# Altium PCB PCB1.PcbDoc
Units mil, origin at the board's own origin, x right, y up, seen from the top; angles counter-clockwise.
Board outline 2952.76 x 1968.5 mil, 4 copper layers (Top Layer, GND, PWR, Bottom Layer); 53 components, 44 nets, 180 pads, 57 vias.
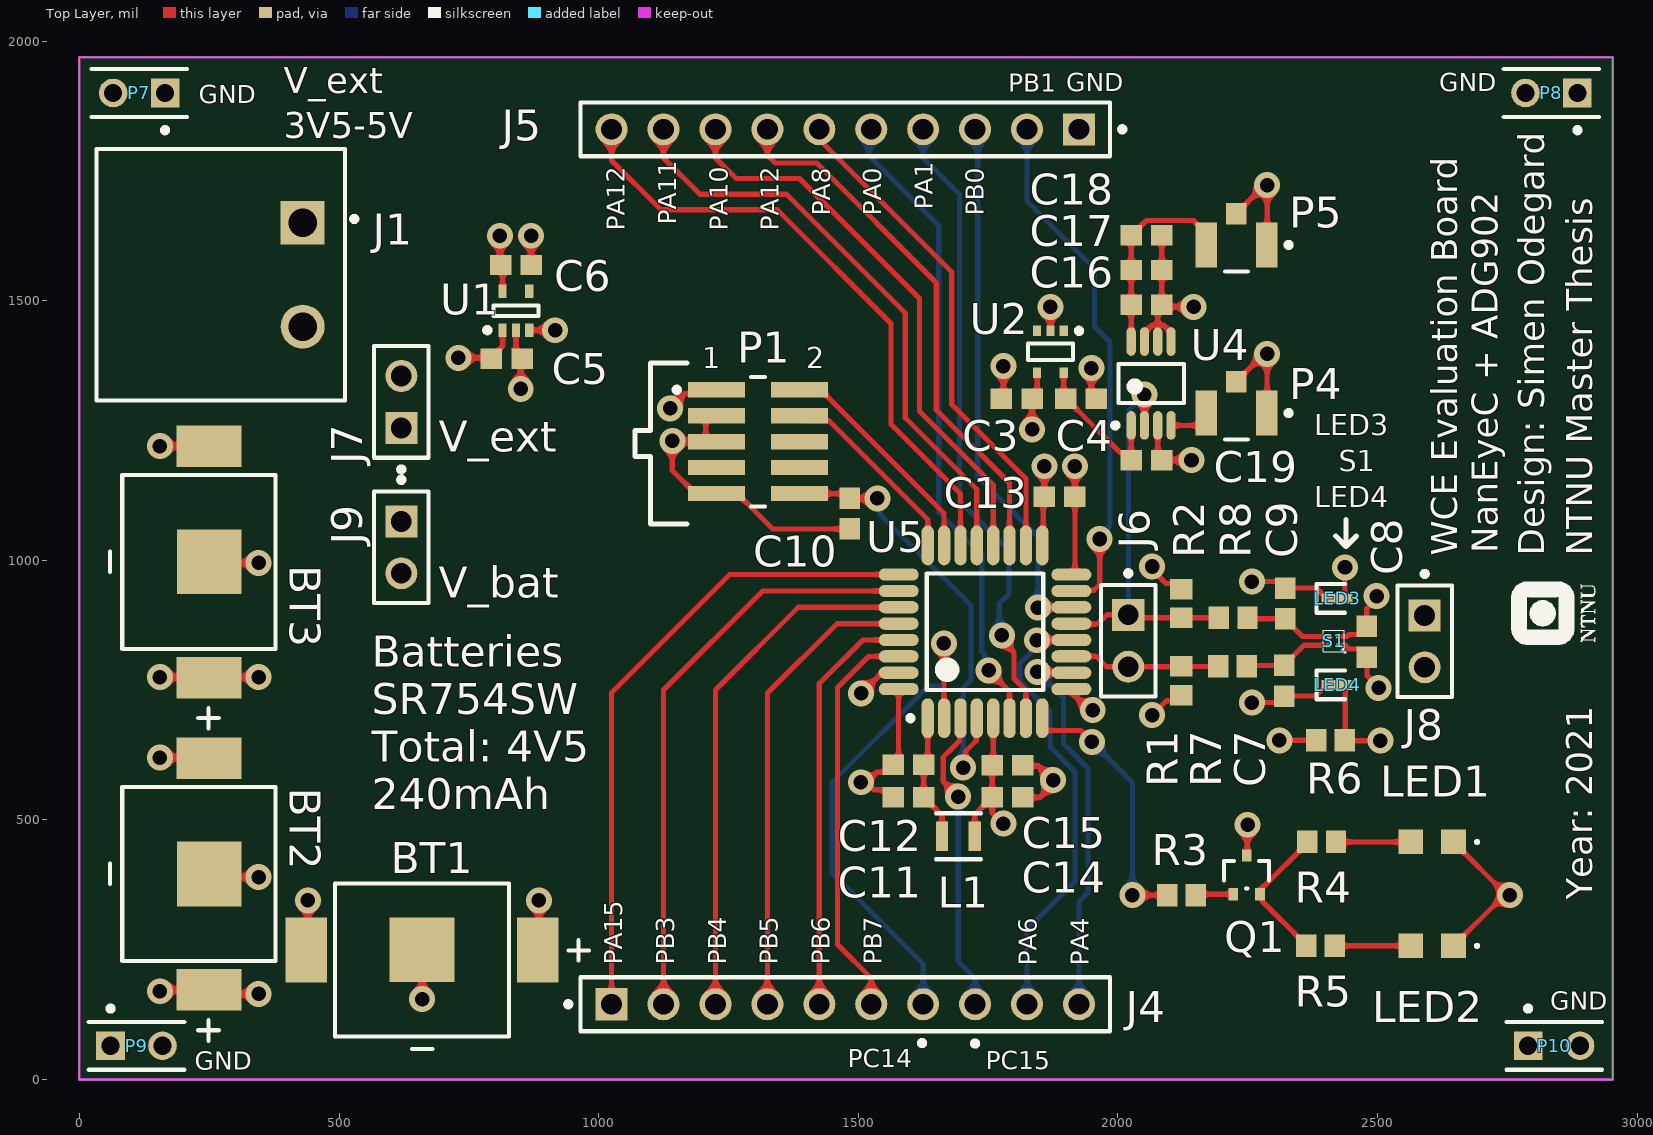
[diagram p0: Top Layer view]
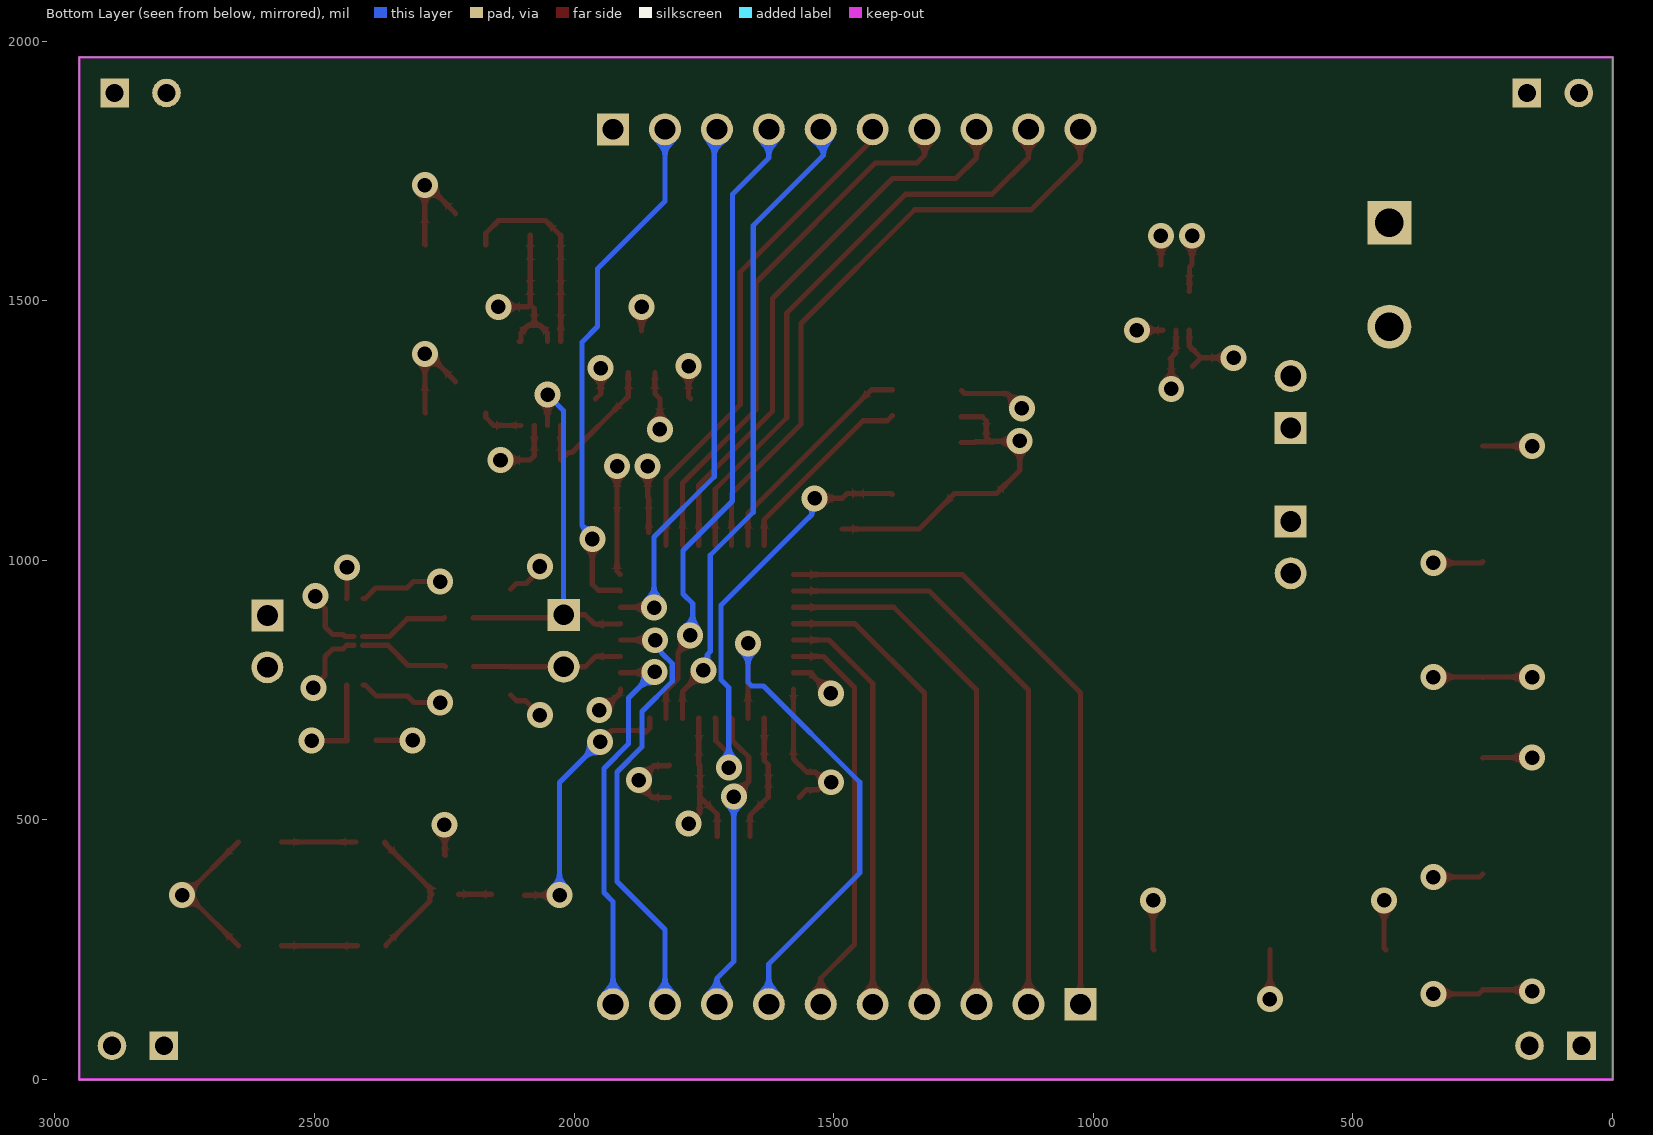
[diagram p1: Bottom Layer view, seen from below]
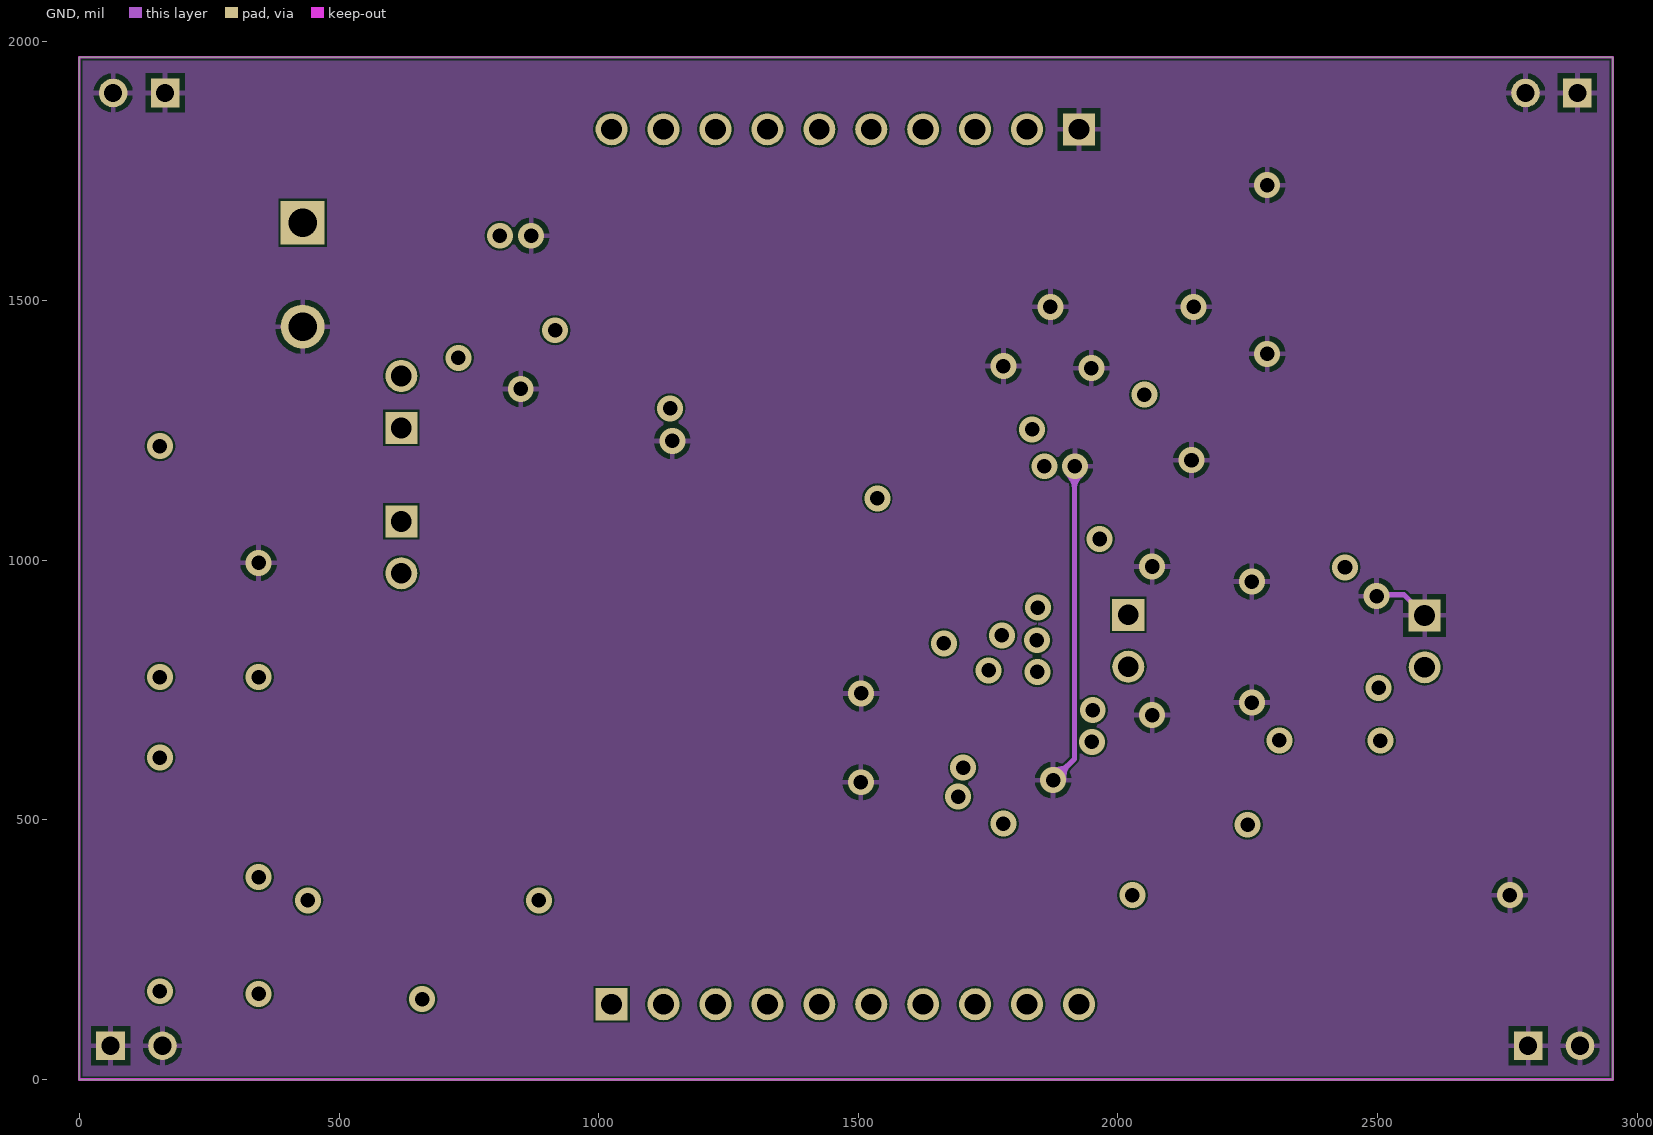
[diagram p2: GND]
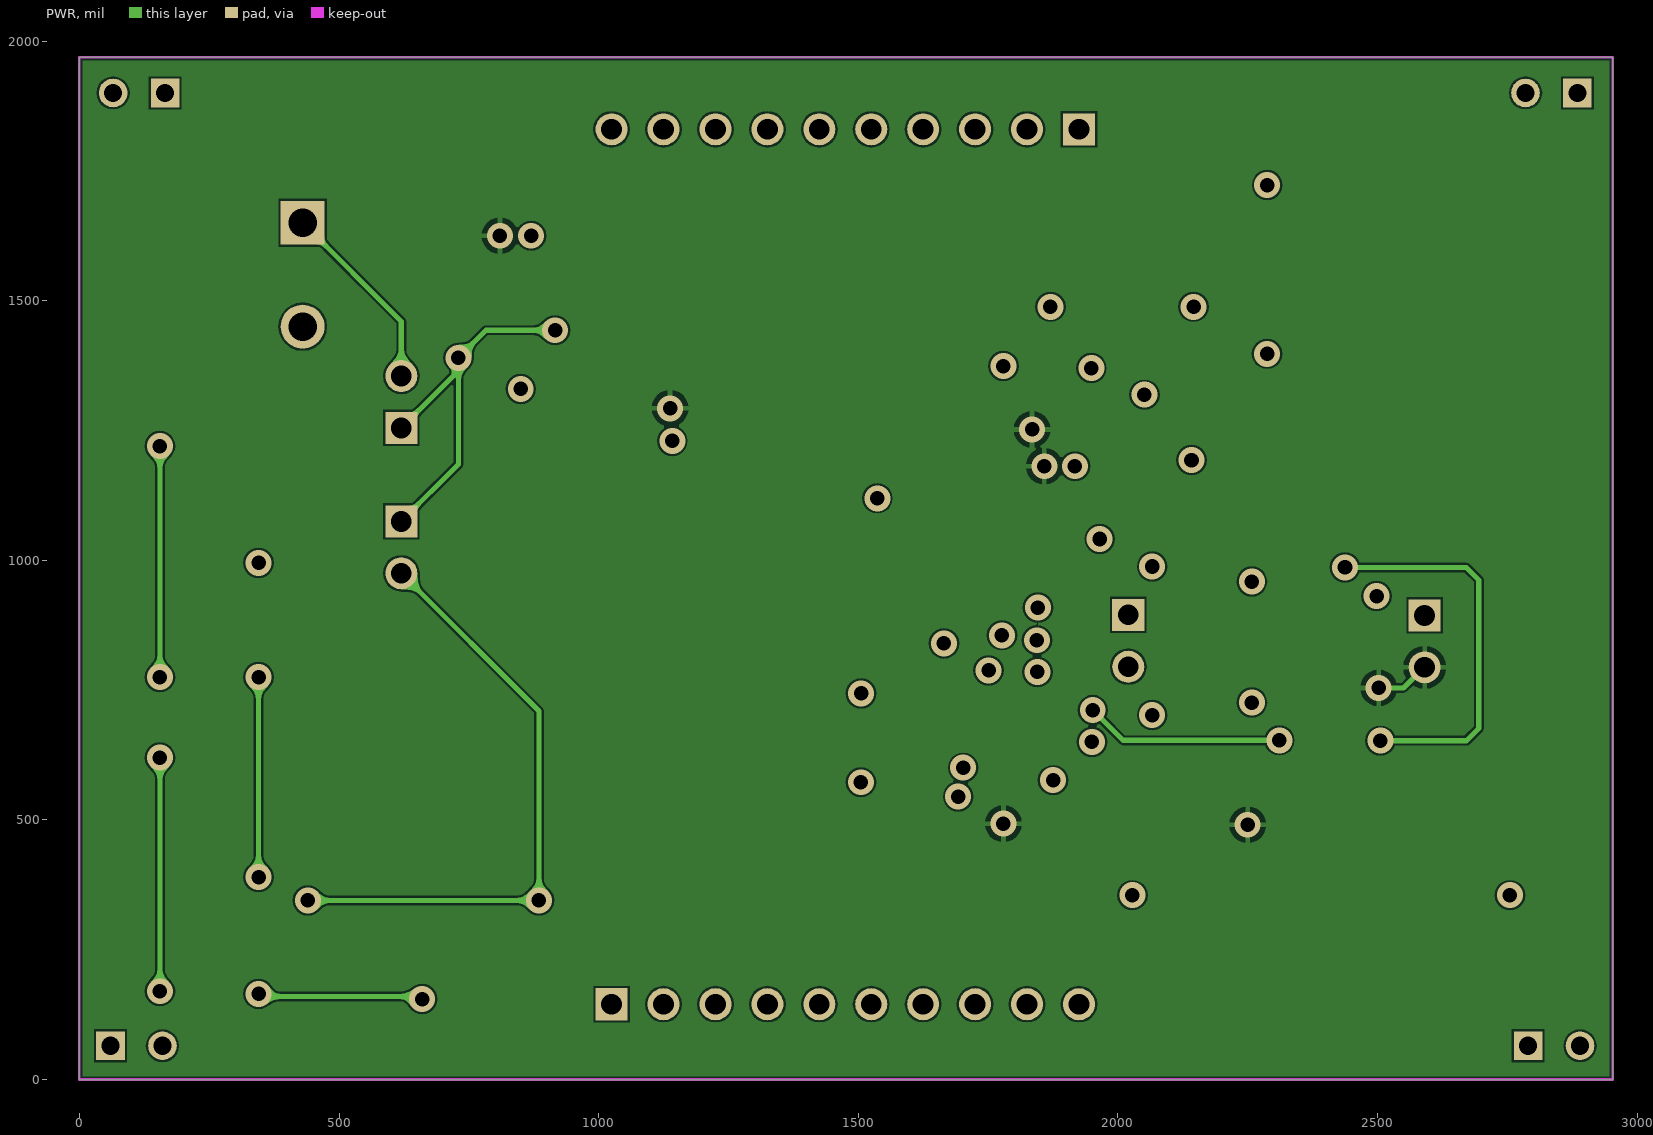
[diagram p3: PWR]

## Layer stack, top to bottom
Top Solder: solder mask 0.4, Solder Resist, Dk 3.5
Top Layer: signal copper 1.4
Dielectric1: core 12.6, FR-4, Dk 4.8
GND: signal copper 1.4
Dielectric2: prepreg 12.6, FR-4, Dk 4.8
PWR: signal copper 1.4
Dielectric3: core 12.6, FR-4, Dk 4.8
Bottom Layer: signal copper 1.4
Bottom Solder: solder mask 0.4, Solder Resist, Dk 3.5

## Board outline
0,0 2952.76,0 2952.76,1968.5 0,1968.5

## Design rules (kind name [scope] priority, off if disabled: settings)
Clearance [All] p1: gap=3.94 ignorepadtopadclearanceinfootprint=TRUE
PolygonConnect [All] p1: connectstyle=Relief reliefconductorwidth=10 reliefentries=4 polygonreliefangle="90 Angle" airgapwidth=10
RoutingCorners [All] p1: cornerstyle=45-Degree minsetback=3.94 maxsetback=3.94
RoutingVias [All] p1: holewidth=28 width=50 viastyle="Through Hole" minholewidth=28 minwidth=50 maxholewidth=28 maxwidth=50
SolderMaskExpansion [All] p1: expansion=4 istentingtop=TRUE useseparateexpansions=TRUE expansionbottom=4 istentingbottom=TRUE
Width [All] p1: maxlimit=10 minlimit=3.94 preferedwidth=10
29 further rules are at their usual default settings.

## Components (designator, comment, footprint, x,y, rotation, side; value= is the part's Value field where it differs from the comment)
BT1 "2988" FP-2988-MFG 660,230 r180 top
BT2 "2988" FP-2988-MFG 230,396 r90 top
BT3 "2988" FP-2988-MFG 230,997 r90 top
C3 "0.1uF_X5R_0603" CAPC1608X90X35NL15T15 1805.12,1311.02 r0 top
C4 "0.1uF_X5R_0603" CAPC1608X90X35NL15T15 1929.13,1311.02 r180 top
C5 "0.1uF_X5R_0603" CAPC1608X90X35NL15T15 823.03,1388.23 r180 top
C6 "0.1uF_X5R_0603" CAPC1608X90X35NL15T15 840.75,1568.7 r180 top
C7 "15pF" CAPC1608X90X35NL15T15 2320.6,768 r90 top
C8 "470nF" CAPC1608X90X35NL15T15 2479.57,843.04 r270 top
C9 "15pF" CAPC1608X90X35NL15T15 2322,917 r270 top
C10 "100nF" CAPC1608X90X35NL15T15 1483.69,1089.83 r90 top
C11 "0.1uF" CAPC1608X90X35NL15T15 1596.46,543.31 r0 top
C12 "100nF" CAPC1608X90X35NL15T15 1596.46,606.3 r0 top
C13 "100nF" CAPC1608X90X35NL15T15 1887.79,1122.05 r180 top
C14 "100nF" CAPC1608X90X35NL15T15 1787.4,543.31 r180 top
C15 "10uF" CAPC1608X90X35NL15T15 1787.4,605.32 r180 top
C16 "470nF" CAPC1608X90X35NL15T15 2055.12,1492.13 r180 top
C17 "NC" CAPC1608X90X35NL15T15 2055.12,1559.06 r180 top
C18 "NC" CAPC1608X90X35NL15T15 2055.12,1625.98 r180 top
C19 "0.1uF_X5R_0603" CAPC1608X90X35NL15T15 2055.12,1192.91 r180 top
J1 "1757242" FP-1757242-MFG 272.52,1550 r270 top
J4 "M20-9771046" FP-M20-9771046-MFG 1475,145 r0 top
J5 "M20-9771046" FP-M20-9771046-MFG 1475,1830 r180 top
J6 "TSW-102-07-G-S" FP-TSW-102-07-G-S-MFG 2020,845 r270 top
J7 "TSW-102-07-G-S" FP-TSW-102-07-G-S-MFG 620,1305 r90 top
J8 "TSW-102-07-G-S" FP-TSW-102-07-G-S-MFG 2590.8,843.88 r270 top
J9 "TSW-102-07-G-S" FP-TSW-102-07-G-S-MFG 620,1025 r270 top
L1 "CB2012T101K" FP-CB2012-MFG 1692.91,468.5 r0 top
LED1 "IN-S85AT5UW" INS85AT5UW 2605,457.5 r180 top
LED2 "IN-S85AT5UW" INS85AT5UW 2605,257.5 r180 top
LED3 "SML-LX0201NWD-TR" LEDC0604X46N 2422,926.5 r0 top
LED4 "SML-LX0201NWD-TR" LEDC0604X46N 2422,759.9 r0 top
P1 "FTSH-105-01-L-DV" SMTC-FTSH-105-01-L-DV_V 1307.09,1228.35 r270 top
P4 "U.FL-R-SMT-1(01)" HRS-U.FL-R-SMT-3_V 2228.35,1283.46 r180 top
P5 "U.FL-R-SMT-1(01)" HRS-U.FL-R-SMT-3_V 2228.35,1607.34 r180 top
P7 "5-146280-2" TECO-5-146280-2_V 115,1900 r180 top
P8 "5-146280-2" TECO-5-146280-2_V 2835,1900 r180 top
P9 "5-146280-2" TECO-5-146280-2_V 110,65 r0 top
P10 "5-146280-2" TECO-5-146280-2_V 2840,65 r0 top
Q1 "BC847BW-7-F" FP-SOT323-MFG 2247.99,394.26 r90 top
R1 "10k" RESC1608X50X30ML20T20 2122,768 r90 top
R2 "10k" RESC1608X50X30ML20T20 2122,917 r270 top
R3 "5k" RESC1608X50X30ML20T20 2122.44,355 r180 top
R4 "40R" RESC1608X50X30ML20T20 2392.5,457.5 r180 top
R5 "40R" RESC1608X50X30ML20T20 2390,257.5 r180 top
R6 "125R" RESC1608X50X30ML20T20 2409.3,653.27 r180 top
R7 "24R" RESC1608X50X30ML20T20 2220.77,795.56 r0 top
R8 "24R" RESC1608X50X30ML20T20 2222,889.44 r0 top
S1 "NanEyeC" NanEyeC 2415.8,844.62 r0 top
U1 "LD59015C33R" SOT323-5L-L036_L 840.75,1480.59 r90 top
U2 "STLQ50C25R" SOT323-5L_L 1870.08,1401.57 r270 top
U4 "ADG902BRMZ" ADI-RM-8_L 2063.98,1340.55 r90 top
U5 "STM32L062K8T6" STM-LQFP32_M 1744.09,862.2 r90 top

## Footprints (in the part's own frame and the unit in brackets; to place one, negate y for a bottom-side part, rotate by r counter-clockwise, add the part's x,y. Pads: shape width x height; smd on the part's side, far side on the other; paste and mask are expansions set on the pad)
ADI-RM-8_L [mm] "TSOP, 8-Leads, Body 3x3mm, Pitch 0.65mm, IPC High Density"
  oval 1.4x0.45 smd: 1(-2.05,0.975) 2(-2.05,0.325) 3(-2.05,-0.325) 4(-2.05,-0.975) 5(2.05,-0.975) 6(2.05,-0.325) 7(2.05,0.325) 8(2.05,0.975)
  silkscreen extent -2.17,-1.6 0.95,1.87, body extent -1.6,-1.6 1.6,1.6, height 1.1
CAPC1608X90X35NL15T15 [mm] "Chip Capacitor, 2-Leads, Body 1.60x0.81mm, IPC Medium Density"
  rect 1.05x1 smd: 1(-0.75,0) 2(0.75,0)
  body extent -0.88,-0.48 0.87,0.48, height 0.9
FP-2988-MFG [mm]
  rect 3.17x3.17 smd paste-1000 mask+0: 1(0,-0.506)
  rect 2.03x3.18 smd paste+0 mask+0: 2(-5.665,-0.506) 2(5.665,-0.506)
  silkscreen extent -8.16,-3.75 4.26,4.34, body extent -6.78,-3.85 6.78,3.85, height 0.25
FP-1757242-MFG [mm]
  rect 2.15x2.15 hole 1.4 paste-1000 mask+0: 1(-2.54,4)
  round 2.15 hole 1.4 paste-1000 mask+0: 2(2.54,4)
  silkscreen extent -6.16,-6.08 6.15,6.65, body extent -6.25,-6.17 6.25,6.17, height 0.25
FP-CB2012-MFG [mm]
  rect 0.6x1.45 smd paste+0 mask+0: 1(-0.8,0) 2(0.8,0)
  silkscreen extent -1.1,-1.13 1.1,1.13, body extent -1.2,-0.82 1.2,0.82, height 0.25
FP-M20-9771046-MFG [mm]
  rect 1.57x1.57 hole 1.02 paste-1000 mask+0: 1(-11.43,0)
  round 1.57 hole 1.02 paste-1000 mask+0: 2(-8.89,0) 3(-6.35,0) 4(-3.81,0) 5(-1.27,0) 6(1.27,0) 7(3.81,0) 8(6.35,0) 9(8.89,0) 10(11.43,0)
  silkscreen extent -13.67,-1.32 12.95,1.32, body extent -13.05,-1.42 13.05,1.42, height 0.25
FP-SOT323-MFG [mm]
  rect 0.6x0.47 smd paste+0 mask+0: 1(-0.95,0.65) 2(-0.95,-0.65) 3(0.95,0)
  silkscreen extent -0.68,-1.1 0.67,1.1, body extent -1.35,-1.2 1.35,1.2, height 0.25
FP-TSW-102-07-G-S-MFG [mm]
  rect 1.57x1.57 hole 1.02 paste-1000 mask+0: 1(-1.27,0)
  round 1.57 hole 1.02 paste-1000 mask+0: 2(1.27,0)
  silkscreen extent -3.42,-1.34 2.73,1.34, body extent -2.83,-1.44 2.83,1.44, height 0.25
HRS-U.FL-R-SMT-3_V [mm] "SMT, 3-Leads, Body 2.6x2.6mm"
  rect 1.05x2.2 smd: 1(-1.475,0) 2(1.475,0)
  rect 1x1.05 smd: 3(0,-1.525)
  silkscreen extent -2.68,-0.12 0.55,1.3, body extent -1.3,-1.3 1.3,1.3, height 1.25
INS85AT5UW [mm]
  rect 1.2x1.2 smd: 1(-1.05,0) 2(1.05,0)
  silkscreen extent -2.25,-0.05 -2.15,0.05, body extent -1,-0.63 1,0.63, height 1.2
LEDC0604X46N [mm]
  rect 0.7x0.5 smd: 1(-0.4,0) 2(0.4,0)
  silkscreen extent -1,-0.7 0.4,0.7
NanEyeC [mm]
  round 0.24 smd mask+0.05: A1(0.213,-0.212) B1(-0.212,-0.212) B2(-0.212,0.213)
  round 0.24 smd paste+0 mask+0.05: A2(0.213,0.213)
  silkscreen extent -0.52,-0.6 0.61,0.52, body extent -0.52,-0.52 0.52,0.53, height 2.17
RESC1608X50X30ML20T20 [mm] "Chip Resistor, 2-Leads, Body 1.60x0.80mm, IPC Low Density"
  rect 1x1.1 smd: 1(-0.7,0) 2(0.7,0)
  body extent -0.9,-0.5 0.9,0.5, height 0.5
SMTC-FTSH-105-01-L-DV_V [mm] "CONN, 10-Leads, Body 6.35x3.43mm, Pitch 1.27mm"
  rect 0.74x2.79 smd: 1(-2.54,-2.035) 2(-2.54,2.035) 3(-1.27,-2.035) 4(-1.27,2.035) 5(0,-2.035) 6(0,2.035) 7(1.27,-2.035) 8(1.27,2.035) 9(2.54,-2.035) 10(2.54,2.035)
  silkscreen extent -3.17,-4.1 3.18,0.34, body extent -3.17,-2.92 3.18,2.92, height 5.96
SOT323-5L-L036_L [mm] "SOT353, 5-Leads, Body 2x1.3mm, Pitch 0.65mm, Lead Span 2.1mm, IPC High Density"
  rect 0.65x0.4 smd: 1(-0.95,0.65) 2(-0.95,0) 3(-0.95,-0.65) 4(0.95,-0.65) 5(0.95,0.65)
  silkscreen extent -1.07,-1.1 0.25,1.52, body extent -0.67,-1.1 0.68,1.1, height 1.1
SOT323-5L_L [mm] "SOT353, 5-Leads, Body 2x1.3mm, Pitch 0.65mm, Lead Span 2.1mm, IPC High Density"
  rect 0.5x0.4 smd: 1(-1.025,0.65) 2(-1.025,0) 3(-1.025,-0.65) 4(1.025,-0.65) 5(1.025,0.65)
  silkscreen extent -1.15,-1.1 0.4,1.53, body extent -0.67,-1.1 0.67,1.1, height 1.1
STM-LQFP32_M [mm] "QFP, 32-Leads, Body 7x7mm, Pitch 0.8mm, IPC Low Density"
  oval 1.95x0.6 smd: 1(-4.225,2.8) 2(-4.225,2) 3(-4.225,1.2) 4(-4.225,0.4) 5(-4.225,-0.4) 6(-4.225,-1.2) 7(-4.225,-2) 8(-4.225,-2.8) 17(4.225,-2.8) 18(4.225,-2) 19(4.225,-1.2) 20(4.225,-0.4) 21(4.225,0.4) 22(4.225,1.2) 23(4.225,2) 24(4.225,2.8)
  oval 0.6x1.95 smd: 9(-2.8,-4.225) 10(-2,-4.225) 11(-1.2,-4.225) 12(-0.4,-4.225) 13(0.4,-4.225) 14(1.2,-4.225) 15(2,-4.225) 16(2.8,-4.225) 25(2.8,4.225) 26(2,4.225) 27(1.2,4.225) 28(0.4,4.225) 29(-0.4,4.225) 30(-1.2,4.225) 31(-2,4.225) 32(-2.8,4.225)
  silkscreen extent -4.35,-2.85 2.85,3.77, body extent -3.5,-3.5 3.5,3.5, height 1.6
TECO-5-146280-2_V [mm] "Connector, 2-Leads, Body 4.67x2.34mm, Pitch 2.54mm"
  rect 1.4x1.4 hole 0.89: 1(-1.27,0)
  round 1.4 hole 0.89: 2(1.27,0)
  silkscreen extent -2.34,-1.17 2.33,1.94, body extent -2.34,-1.17 2.34,1.17, height 5.33

## Part data
BT1 BT2 BT3: library part CMP-19636-000008-1, "BATTERY RETAINER COIN 7.9MM SMD", Case/Package=SMD/SMT, Package Quantity=100, Mount="Surface Mount", Number of Batteries=1, Number of Cells=1, REACH SVHC="No SVHC", Termination=SMD/SMT
C3 C4 C5 C6 C7 C8 C9 C10 C11 C12 C13 C14 C15 C16 C17 C18 C19: library part CMP-2006-04463-1, Manufacturer="AVX Interconnect / Elco", Part Number=06035D104KAT2A
J1: library part CMP-09399-000010-1, "TERM BLOCK HDR 2POS 90DEG 5.08MM", Color=Grey, Current=15A, Current Rating=12A, Flammability Rating="UL94 V-0", Housing Color=Green, Package Quantity=50, Voltage=300V, Voltage Rating=250V, Voltage Rating (DC)=320V, Approvals=UL, Connector Type=Plug, Contact Material=Tin, Contact Plating=Tin, Depth=12mm, Gender=Male, Height=12.08mm, Housing Material=PBT, Lead Free="Lead Free", Length=12.16mm, Max Current Rating=12A, Mount="Through Hole", Number of Contacts=2, Number of Levels=1, Number of Poles=2, Number of Positions=2, Number of Positions Per Level=2, Number of Rows=1, Orientation="Right Angle", Packaging=Bulk, Pitch=5.08mm, REACH SVHC="No SVHC", RoHS Compliant=Yes, Series=MSTBA, Termination=Solder, Weight=5.396916oz, Width=12.1mm
J4 J5: library part CMP-15831-000029-1, "CONN HEADER VERT 10POS 2.54MM", Case/Package=SIL, Color=Black, Current Rating=3A, Package Quantity=500, Voltage Rating=750V, Connector Type="Male Pin", Contact Material=Brass, Contact Mating Length=0.228inch, Contact Plating=Tin, Contact Type="Male Pin", Gender=Male, Housing Material=Nylon, Mount="Through Hole", Number of Contacts=10, Number of Positions=10, Number of Rows=1, Packaging=Bulk, Pitch=2.54mm, Radiation Hardening=No, Series=M20, Termination=Solder
J6 J7 J8 J9: library part CMP-02766-000084-1, "CONN HEADER VERT 2POS 2.54MM", Current Rating=6.3A, Manufacturer=Samtec, Temperature="-55°C to +125°C", Temperature Range High=+125°C, Temperature Range Low=-55°C, Voltage Rating=550V, Automotive=No, Category=Conn, ComponentLink2Description=Datasheet, ComponentLink2URL=http://suddendocs.samtec.com/catalog_english/tsw_th.pdf, Conn Gender=Male, Conn Orientation=Straight, Contact Material=Gold,Nickel, Device Class L1=Connectors, Device Class L2="Headers and Wire Housings", Device Class L3=unset, Digikey Description="CONN HEADER VERT 2POS 2.54MM", Footprint Url=http://suddendocs.samtec.com/prints/tsw-xxx-xx-x-x-xx-xxx-footprint.pdf, Height=8.71mm, Lead Free=Yes, Manufacturer Part Number=TSW-102-07-G-S, Mouser Description="Conn Unshrouded Header HDR 2 POS 2.54mm Solder ST Thru-Hole Automotive Bulk", Number of Contacts=2, Number of Rows=1, Octopart=https://octopart.com/tsw-102-07-g-s-samtec-272197, Package=TSW-102-07-G-S, Pitch=2.54mm, RoHS=TRUE
L1: library part CMP-14484-000220-1, "SMD Inductors 100uH ±10% 0.13A 9.1Ω 0805", Case Code (Imperial)=0805, Case Code (Metric)=2012, Current Rating=130mA, DC Resistance (DCR)=9.1R, Inductance=100uH, Inductance Tolerance=10%, Max Operating Temperature=105°C, Min Operating Temperature=-40°C, Package Quantity=3000, Resistor Type=Wirewound, Saturation Current=60mA, Self Resonant Frequency=8MHz, Test Frequency=796kHz, Case/Package=0805, Core Material=Ferrite, Depth=1.45mm, Halogen Free="Halogen Free", Height=0.9mm, Height - Seated (Max)=0.057inch, Lead Free="Lead Free", Length=0.079inch, Max DC Current=130mA, Mount="Surface Mount", Number of Pins=2, Packaging="Tape and Reel", Radiation Hardening=No, RoHS Compliant=Yes, Series=CB, Shielding=Unshielded, Termination=SMD/SMT, Tolerance=10%, Width=0.049inch
LED1 LED2: "LED", Manufacturer_Name=Inolux, Mouser Part Number=743-IN-S85AT5UW, Arrow Part Number=IN-S85AT5UW, Arrow Price/Stock=https://www.arrow.com/en/products/in-s85at5uw/inolux-corporation, Datasheet Link=http://www.inolux-corp.com/datasheet/SMDLED/Mono%20Color%20Top%20View/IN-S85AT%20Series_V1.1.pdf, Height=1.1mm, Manufacturer_Part_Number=IN-S85AT5UW, Mouser Price/Stock=https://www.mouser.co.uk/ProductDetail/Inolux/IN-S85AT5UW?qs=fAHHVMwC%252BbgX8qoUxtYjNQ%3D%3D
LED3 LED4: "LED", Manufacturer_Name=Lumex, Mouser2 Part Number=696-SMLLX0201NWDTR, Datasheet Link=https://componentsearchengine.com//SML-LX0201NWD-TR.pdf, Height=0.46mm, Manufacturer_Part_Number=SML-LX0201NWD-TR, Mouser2 Price/Stock=https://www.mouser.com/Search/Refine.aspx?Keyword=696-SMLLX0201NWDTR
P1: library part CMP-2000-05354-1, "Male Header, Pitch 1.27 mm, 2 x 5 Position, Height 5.96 mm, -55 to 125 degC, RoHS, Bulk", Color=Black, Manufacturer=Samtec, Standard Package=1, Catalog Drawings=FTSHSeriesFTSHSeriesSMTSide, Category=Connectors,Interconnects, Connector Type=Header,Unshrouded, Contact Finish=Gold, Contact Finish Thickness=10µin(0.25µm), Contact Mating Length="0.120\"(3.05mm)", Contact Type=MalePin, Datasheet URL=https://datasheet.ciiva.com/30493/0900766b80adfe36-30493006.pdf, Datasheet Version=Feb-08, EDA / CAD Models=DownloadfromAcceleratedDesigns, Family=RectangularConnectors-Headers,MalePins, Fastening Type=-, Featured Product=Board-To-BoardInterconnectSystems, Features=-, Manufacturer URL=http://www.samtec.com/, Mating Products="FLE-105-01-G-DV-TR-ND-CONNSKT1.27MM10POSDUALSMDCLP-105-02-G-D-P-TR-ND-CONNRCPT10POSDUAL.05\"SMDSFMC-105-L2-S-D-TR-ND-CONN.05\"SURFACE10POSSMTSFMH-105-02-L-D-TR-ND-CONNRECEPT10POS.50\"SMTFLE-105-01-G-DV-A-ND-CONNSKT1.27MM10POSDUALSMDCLP-105-02-G-D-BE-ND-CONNRCPT10POSDUAL.05\"SMDFLE-105-01-G-DV-A-P-ND-CONNSKT1.27MM10POSDUALSMDSAM1153-05-ND-CONNRCPT10POSDUAL.05\"SMDSAM1155-05-ND-CONNRCPT10POSDUAL.05\"SMDSAM1154-05-ND-CONNRCPT10POSDUAL.05\"SMDSFMH-105-02-L-D-LC-ND-CONNRECEPT10POS.50\"SMTSAM1226-05-ND-CONNRCPT.05\"10POSDUALSMD", Mounting Type=SurfaceMount, Number of Positions=10, Number of Positions Loaded=All, Number of Rows=2, Online Catalog=FTSHSeries, Other Names=SAM1161-05, Packaging=Bulk, Pitch="0.050\"(1.27mm)", Product Training Modules=Board-to-BoardConnectors, Row Spacing="0.050\"(1.27mm)", Series=FTSH, Termination=Solder
P4 P5: library part CMP-2000-05153-1, "Ultra Small Coaxial Connector, 6 GHz, -40 to 90 degC, 3-Pin SMD, RoHS, Bulk", Dielectric Material=LiquidCrystalPolymer(LCP), Frequency - Max=6GHz, Housing Color=Silver, Manufacturer="Hirose Electric", Operating Temperature=-40degC~90degC, Package Description="3-Pin Surface Mount Device, Body 2.6 x 2.6 mm", Package Reference=U.FL-R-SMT, Standard Package=100, Body Finish=Silver, Body Material=PhosphorBronze, Category=Connectors,Interconnects, Center Contact Material=PhosphorBronze, Center Contact Plating=Gold, Connector Style=U.FL, Connector Type=Jack,MalePin, Contact Termination=Solder, Datasheet URL=https://datasheet.ciiva.com/26945/getdatasheetpartid-475239-26945414.pdf, Datasheet Version=Feb-09, Dynamic Catalog=U.FLSeries, Family=CoaxialConnectors(RF), Fastening Type=Snap-On, Featured Product=HiroseU.FLSeries, Impedance=50Ohm, Manufacturer URL=https://www.hirose.com, Minimum Quantity=UltraMiniatureCoaxial, Mounting Type=SurfaceMount, Online Catalog=U.FLSeries, Other Names="H122041 / U.FL-R-SMT-1(01)-ND", Packaging=Bulk, Quantity Available=Bulk, Series=U.FL, Shield Termination=Solder, Unit PriceUSD=U.FL
P7 P8 P9 P10: library part CMP-2000-07492-1, "Male Header, Pitch 2.54 mm, 1 x 2 Position, Height 8.21 mm, Tail Length 3.05 mm, -65 to 105 degC, RoHS, Bulk", Case\/Package=100, Colour=Black, Current Rating=3A, Flammability Rating=UL94V-0, High Temperature Housing=Yes, Manufacturer="TE Connectivity", Max Current Rating=5A, Max Operating Temperature=105degC, Min Operating Temperature=-65degC, Package Description="Male Header, Pitch 2.54 mm, 1 x 2 Position, Height 8.21 mm, Tail Length 3.05 mm", Package Quantity=500, Approvals=CSA, Board Standoff=No(Without), Connector Type=Header, Contact Gender=Male, Contact Material=CopperAlloy, Contact Mating Length=0.23inch, Contact Plating=Matte, Contact Protection=No(Without), Contact Shape=Square, Datasheet URL=http://www.te.com/commerce/DocumentDelivery/DDEController?Action=showdoc&DocId=Customer+Drawing%7F146280%7FH1%7Fpdf%7FEnglish%7FENG_CD_146280_H1.pdf%7F5-146280-2, Datasheet Version="Rev. H1, 08/2016", Depth=2.34mm, Gasket=No(Without), High Speed Serial Data Connector=No, Housing Colour=Black, Housing Material=Polymer, Keyed=No, Length=4.67mm, Manufacturer URL=http://www.te.com/, Mating Alignment=No(Without), Mating Connector Lock=No(Without), Mating Post Length=0.23inch, Mount=ThroughHole, Mounting Technology=ThroughHole, Number of Contacts=2, Number of Positions=2, Number of Rows=1, Orientation=Straight, Package Reference=5-146280-2, Packaging=Carton, Panel Mount Retention=No(Without), PCB Mount Retention=Without, PCB Mounting Orientation=Vertical, PCB Thickness=0.063inch, Pitch=2.54mm, Radiation Hardening=No, RoHSCompliant=true, Row Spacing=2.54mm, Selectively Loaded=No(Without), Stabilizers=No(Without), Termination=ThroughHole, Termination Post Length=0.12inch
Q1: library part CMP-12798-000012-1, "TRANS NPN 45V 0.1A SC70-3", Collector Base Voltage=50V, Collector Emitter Breakdown Voltage=45V, Collector Emitter Saturation Voltage=200mV, Emitter Base Voltage=6V, Manufacturer="Diodes Inc", Max Collector Current=100mA, Max Junction Temp=+150°C, Package=SOT323, Power Dissipation=200mW, Temperature="-65°C to +150°C", Temperature Range Low=-65°C, Unity Gain Freq=300MHz, Automotive=Yes, Automotive Grade="Grade 0", Category=Trans, Collector Emitter Voltage=45V, ComponentLink2Description=Datasheet, ComponentLink2URL=https://www.diodes.com/assets/Datasheets/ds30250.pdf, Device Class L1="Discrete Semiconductors", Device Class L2=Transistors, Device Class L3=BJTs, Digikey Description="TRANS NPN 45V 0.1A SC70-3", Footprint Url=https://www.diodes.com/assets/Package-Files/SOT323.pdf, Height=1.1mm, Hfe Max=450, Hfe Min=200, Hfe Testic=2mA, Hfe Testvce=5V, Ipc Land Pattern Name=SOT65P210X100-3, Lead Free=Yes, Manufacturer Part Number=BC847BW-7-F, Mouser Description="Bipolar Transistors - BJT BIPOLAR TRANSISTOR NPN SOT-323", Number Of Elements=1, Number Of Npn=1, Octopart=https://octopart.com/bc847bw-7-f-diodes+inc.-354380, RoHS=TRUE, Rthja Max=625°C/W, Standoff Height=0mm, Temperature Range High=+150°C
R1 R2 R3 R4 R5 R6 R7 R8: library part CMP-2000-02665-1, Manufacturer=Susumu, Part Number=RR0816P-4640-D-65A
S1: "Camera module NanEyeC from AMS. The Part will be delivered by us"
U1: library part CMP-0244-00349-1, "150 mA Low Noise High PSRR linear Voltage Regulator, 3.3V, 5-Pin SOT-323, Tape and Reel", ComponentLink1Description="Manufacturer URL", ComponentLink1URL=http://www.st.com, ComponentLink2Description=Datasheet, ComponentLink2URL=http://www.st.com/internet/com/TECHNICAL_RESOURCES/TECHNICAL_LITERATURE/DATASHEET/CD00273252.pdf, DatasheetVersion=1/12/2011, PackageDescription="5-Pin SOT-323 Package, 2 x 1.3 mm Body, 0.65 mm Pitch, 2.1 mm Lead Span", PackageReference=SOT323-5L-L036, PackageVersion=1/01/2011
U2: library part CMP-0244-00360-1, "50mA, 3µA Supply Current Low Drop Linear Regulator, 2.5V, 5-Pin SOT-323, Tape and Reel", ComponentLink1Description="Manufacturer URL", ComponentLink1URL=http://www.st.com, ComponentLink2Description=Datasheet, ComponentLink2URL=http://www.st.com/internet/com/TECHNICAL_RESOURCES/TECHNICAL_LITERATURE/DATASHEET/CD00151464.pdf, DatasheetVersion=1/11/2007, PackageDescription="5-Pin SOT-323 Package, 2 x 1.3 mm Body, 0.65 mm Pitch, 2.1 mm Lead Span", PackageReference=SOT323-5L, PackageVersion=1/01/2006
U4: library part CMP-0290-00054-1, "RF Switch, Wideband, 40 dB Isolation at 1 GHz, CMOS 1.65 V to 2.75 V, SPST Switches, RM-8, Pb-Free, 50 Tube", Off Isolation Test Freq=1G, Supply Voltage="Single (+1.65V to +2.75V)", # Sw Functions=1, Bandwidth=4.5GHz, Code_JEDEC=MO-187-AA, ComponentLink1Description="Manufacturer URL", ComponentLink1URL=www.analog.com, ComponentLink2Description=Datasheet, ComponentLink2URL=http://www.analog.com/static/imported-files/data_sheets/ADG901_902.pdf, ComponentLink3Description="Package Specification", ComponentLink3URL=http://www.analog.com/static/imported-files/packages/PKG_PDF/MSOP%28RM%29/RM_8.pdf, Configuration=SPST/NO, DatasheetVersion=RevB, Insertion Loss (dB)=800mdB, Off Isolation=37dB, P-1dB (dBm)=17, PackageDescription="8-Lead Mini Small Outline Package [MSOP]", PackageReference=RM-8, PackageVersion=Aug-2005
U5: library part CMP-1546-00066-1, "Ultra-Low-Power ARM Cortex-M0+ MCU, 64 KB Flash, 8 KB Internal RAM, 27 I/Os, 32-Pin LQFP, -40 to 85 degC, Tray", I/Os (High Current)=27, Operating Frequency(F) (Processor speed) (MHz)=32, Package Description="32-Pin Low Profile Quad Flat Package, 7 x 7 mm Body, 0.8 mm Pitch", Package Reference=LQFP32, Supply Voltage(Vcc) min (V)=1.65, ComponentLink1Description="Manufacturer URL", ComponentLink1URL=http://www.st.com/, ComponentLink2Description=Datasheet, ComponentLink2URL=http://www.st.com/st-web-ui/static/active/en/resource/technical/document/datasheet/DM00108218.pdf, Core="ARM Cortex-M0+", D/A Converter=1, Data E2PROM nom (B)=2048, DatasheetVersion="Rev. 7", FLASH Size (Prog) (kB)=64, Internal RAM Size (kB)=8, Mounting Technology="Surface Mount", Packing=Tray

## Via types
v1: diameter 50, hole 28, Top Layer to Bottom Layer, tented both sides, 57 vias

## Nets (pads, with @x,y where several pads share a name; then routed paths per layer and width w, separated by ;. In a path a pad name is that pad's centre, name@x,y a point inside that pad or via, vN(x,y) a via of type N, cw(c..) or ccw(c..) an arc to the next point about the centre after c; other vN are vias at no path point)
2V5: C4.2 C19.2 U2.5 U4.1 | length 293.7
  Top Layer w10: U2.5 1895.67,1314.96 C4.2 1900.59,1311.02 2004.01,1207.6 2010.91,1207.6 C19.2 U4.1
ADG902_RF1: P4.2 U4.4 | length 82.4
  Top Layer w10: U4.4 2154.61,1259.84 2170.28,1275.51 P4.2
ADG902_RF2: C16.2 C17.2 C18.2 P5.2 U4.8 | length 394.1
  Top Layer w10: U4.8 C16.2 C17.2 C18.2 2026.57,1625.98 2055.2,1654.61 2145.64,1654.61 2170.28,1629.98 P5.2
GND: BT3.1 C3.1 C4.1 C5.1 C6.1 C7.1 C8.1 C9.1 C10.1 C11.1 C12.1 C13.1 C14.1 C15.1 C16.1 C17.1 C18.1 C19.1 J1.2 J5.1 J8.1 LED1.1 LED2.1 LED3.1 LED4.1 P1.3 P1.5 P1.9 P4.1 P4.3 P5.1 P5.3 P7.1 P7.2 P8.1 P8.2 P9.1 P9.2 P10.1 P10.2 R1.1 R2.1 S1.A2 U1.2 U2.2 U4.3 U4.5 U4.6 U4.7 U5.16 U5.31 U5.32 | length 4336.3
  Top Layer w10: BT3.1 251.94,995 v1(345,995) ; J1.2@437.86,1450 J1.2@440.04,1450 ; U1.2 840.75,1400.04 C5.1 850,1385.67 v1(850,1330) ; v1(870,1625) 870,1568.98 C6.1 ; P1.5@1194.98,1226.54 1192.46,1229.07 1142.53,1229.07 v1(1141.81,1229.79) 1141.81,1173.15 1186.61,1128.35 P1.9 1267.32,1128.35 1335.36,1060.31 C10.1 ; P1.5@1194.98,1228.35 P1.5@1196.72,1228.35 ; P1.5@1226.97,1226.54 P1.5@1254.4,1226.54 ; P1.5 P1.5@1196.72,1228.35 ; P1.3@1254.4,1276.54 1214.05,1276.54 1206.28,1268.78 1206.28,1237.91 P1.5@1196.72,1228.35 ; v1(1505,572.5) v1@1515.82,572.5 ; v1(1505.5,743.54) 1545.43,783.46 U5.31 ; C11.1 1552.24,557.99 1530.33,557.99 v1@1515.82,572.5 ; U5.32 1577.76,617.12 C12.1 1565.95,606.3 1551.26,591.61 1534.94,591.61 v1@1515.82,572.5 ; C3.1 1779.53,1314.96 v1(1779.53,1374.02) ; C14.1 1850.39,543.31 1875.19,568.1 v1(1875.19,576.51) ; C15.1 1818.08,604.17 1846.74,604.17 v1@1874.4,576.51 ; U2.2 v1(1870.08,1488.19) ; U5.16 1911.03,972.44 1917.32,978.73 C13.1 v1(1917.32,1181.1) ; v1(1948.82,1370.08) 1948.82,1320.87 C4.1 ; U4.7 2051.18,1437.87 2066.06,1452.76 2076.77,1452.76 ; v1(2066,702) 2093.41,729.41 2110.97,729.41 R1.1 ; v1(2066,988) 2066,981.79 2092.61,955.18 2111.38,955.18 R2.1 ; U4.3 2076.77,1200.79 C19.1 v1(2141.73,1192.91) ; C18.1 C17.1 C16.1 ; U4.5@2106.3,1421.26 U4.5 2102.36,1437.87 2087.48,1452.76 2076.77,1452.76 ; v1(2145.67,1488.19) 2088.58,1488.19 C16.1 ; P4.3 2228.35,1344.49 2281.49,1397.64 v1(2287.4,1397.64) 2287.4,1284.45 P4.1 ; P5.3 2228.35,1668.36 2282.49,1722.5 v1(2287.5,1722.5) 2287.5,1608.42 P5.1 ; v1(2258,726) 2308.13,726 C7.1 2380.88,738.47 2402.31,759.9 LED4.1 ; v1@2258.77,958.98 2309.55,958.98 C9.1 2382.29,946.53 2402.31,926.5 LED3.1 ; S1.A2 2440.98,852.99 2444.89,856.9 2464.89,856.9 2479.57,871.58 C8.1 2479.39,872.75 2479.39,906.67 2498.16,925.43 v1(2498.16,931) ; LED2.1 2736.19,347.35 2747.35,347.35 v1(2755,355) 2748.84,355 LED1.1 ; 2076.77,1452.76 2076.77,1484.25 C16.1
  GND w10: v1(1875.19,576.51) 1916.15,617.47 1916.15,1179.93 v1(1917.32,1181.1) ; v1(2498.16,931) 2500.7,933.55 2551.13,933.55 J8.1
  other v1: 2258,959
LED: R6.2 U5.9 | length 516.2
  Top Layer w10: U5.9 1910.43,745.12 1944.14,711.41 v1(1951.61,711.41) ; v1(2310.88,653.27) R6.2
  PWR w10: v1(1951.61,711.41) 2009.75,653.27 v1(2310.88,653.27)
LED_EN: R3.2 U5.8 | length 523.7
  Top Layer w10: U5.8 1854.33,676.12 1860.62,669.82 1860.62,672.04 1928.16,672.04 v1(1950.09,650.12) ; v1(2027.95,355) R3.2
  Bottom Layer w10: v1(1950.09,650.12) 2027.95,572.25 v1(2027.95,355)
NetBT1_1: BT1.1 BT2.2 | length 1154
  Top Layer w10: v1(155,170) 157.97,172.97 249.94,172.97 257.91,165 v1(345,165) ; v1(155,620) 248.97,620 BT2.2@249.94,619.03 ; v1(660,155) BT1.1
  PWR w10: v1(155,170) v1(155,620) ; v1(345,165) 350,160 655,160 v1(660,155)
NetBT2_1: BT2.1 BT3.2 | length 1213.4
  Top Layer w10: v1(155,775) 248.91,775 249.94,773.97 250.97,775 v1(345,775) ; v1(155,1220) BT3.2@249.91,1220 ; BT2.1 255.94,390 v1(345,390)
  PWR w10: v1(155,775) v1(155,1220) ; v1(345,390) v1(345,775)
NetC7_2: C7.2 R7.2 S1.B1 | length 176.5
  Top Layer w10: R7.2 2250.3,797.53 C7.2 2320.6,798.51 2358.35,836.26 S1.B1
NetC9_2: C9.2 R8.2 S1.B2 | length 173.5
  Top Layer w10: R8.2 2251.53,887.47 C9.2 2322,886.49 2355.5,852.99 S1.B2
NetLED1_2: LED1.2 R4.1 | length 143.6
  Top Layer w10: R4.1 LED1.2
NetLED2_2: LED2.2 R5.1 | length 146.1
  Top Layer w10: R5.1 LED2.2
NetLED3_2: LED3.2 LED4.2 R6.1 | length 988.6
  Top Layer w10: v1(2437.36,986.27) 2437.55,986.08 2437.55,926.7 LED3.2 ; LED4.2 2437.75,654.15 R6.1 2437.54,652.59 v1(2505.55,652.59)
  PWR w10: v1(2437.36,986.27) 2670.88,986.27 2694.92,962.23 ; v1(2505.55,652.59) 2671.14,652.59 2695.18,676.63 ; 2695.06,676.5 2695.06,962.09
NetQ1_1: Q1.1 R3.1 | length 63
  Top Layer w10: R3.1@2159.4,356.86 Q1.1
NetQ1_2: Q1.2 R4.2 R5.2 | length 278.1
  Top Layer w10: R5.2 2362.44,259.47 2277.83,344.08 2277.83,352.61 Q1.2 2277.83,361.11 2277.83,368.42 2364.94,455.53 R4.2 R4.2@2362.5,455.06
NRST: C10.2 P1.10 U5.4 | length 876.7
  Top Layer w10: P1.10@1387.2,1126.54 1389.01,1128.35 1474.71,1128.35 C10.2 v1@1534.87,1119.36 ; v1(1536.66,1119.36) v1@1534.87,1119.36 ; v1@1551.6,1119.36 v1@1534.87,1119.36 ; v1(1702.01,600.49) 1706.96,605.44 1706.96,632.11 1727.28,652.44 1727.28,694.8 U5.4
  Bottom Layer w10: v1(1536.66,1119.36) 1542.15,1113.87 1542.15,1088.28 1558.15,1072.28 1716.92,913.51 1716.92,769.87 1702.01,754.96 v1(1702.01,600.49)
PA0: J5.5 U5.6 | length 1248.6
  Top Layer w10: v1(1750.86,787.93) 1791.34,747.44 U5.6
  Bottom Layer w10: J5.5 1520,1825 1520,1780 1655,1645 1655,1092.5 1737.66,1009.84 1737.66,824.29 1743.2,818.74 1743.2,795.58 v1(1750.86,787.93)
PA1: J5.4 U5.7 | length 1231.3
  Top Layer w10: v1(1776.72,855.53) 1776.72,845.53 1800,822.25 1800,772.18 1822.83,749.35 U5.7
  Bottom Layer w10: J5.4 1625,1775 1695,1705 1695,1114 1790,1019 1790,934.91 1771.6,916.51 1771.6,860.65 v1(1776.72,855.53)
PA4: J4.10 U5.10 | length 753.7
  Top Layer w10: v1(1845,785) 1846.54,783.46 U5.10
  Bottom Layer w10: v1(1845,785) 1895,735 1895,646.55 1942.5,599.05 1942.5,360 1925,342.5 J4.10
PA6: J4.9 U5.12 | length 863.7
  Top Layer w10: v1(1844,846) 1844.46,846.46 U5.12
  Bottom Layer w10: J4.9 1825,288.78 1917.5,381.28 1917.5,592.5 1869,641 1869,709 1811.06,766.94 1811.06,801.06 1831.72,821.72 1831.72,822.89 1844,835.18 v1(1844,846)
PA8: J5.6 U5.18 | length 966.2
  Top Layer w10: J5.6 1434.91,1820.09 1434.91,1800.09 1680,1555 1680,1300 1822.83,1157.17 U5.18
PA9: J5.7 U5.19 | length 1041.5
  Top Layer w10: J5.7 1325,1780 1340,1765 1420,1765 1650,1535 1650,1290 1791.34,1148.66 U5.19
PA10: J5.8 U5.20 | length 1094.5
  Top Layer w10: J5.8 1225,1775 1265,1735 1387.05,1735 1618.11,1503.94 1618.11,1286.89 1759.84,1145.16 U5.20
PA11: J5.9 U5.21 | length 1149.2
  Top Layer w10: J5.9 1125,1775 1195,1705 1361.93,1705 1590.55,1476.38 1590.55,1274.45 1728.35,1136.65 U5.21
PA12: J5.10 U5.22 | length 1210.9
  Top Layer w10: J5.10 1025,1770 1120,1675 1343.9,1675 1562.99,1455.91 1562.99,1262.01 1696.85,1128.15 U5.22
PA15: J4.1 U5.25 | length 1247
  Top Layer w10: J4.1 1025,745 1252.44,972.44 U5.25
PB0: J5.3 U5.14 | length 1035.7
  Top Layer w10: v1(1846,909) 1846.45,909.45 U5.14
  Bottom Layer w10: J5.3 1730,1825 1730,1161 1846,1045 v1(1846,909)
PB1: J5.2 U5.15 | length 1010.7
  Top Layer w10: U5.15 1911.77,942.28 1953.58,942.28 1965,953.7 v1(1965,1041)
  Bottom Layer w10: J5.2 1825,1691.33 1955,1561.33 1955,1450 1985,1420 1985,1066.86 1965,1046.86 v1(1965,1041)
PB3: J4.2 U5.26 | length 1136.8
  Top Layer w10: J4.2 1125,750 1315.94,940.94 U5.26
PB4: J4.3 U5.27 | length 1023.8
  Top Layer w10: J4.3 1225,750 1384.45,909.45 U5.27
PB5: J4.4 U5.28 | length 907.3
  Top Layer w10: J4.4 1325,744.14 1458.79,877.93 1495.43,877.93 U5.28
PB6: J4.5 U5.29 | length 805
  Top Layer w10: J4.5 1425,762.5 1508.96,846.46 U5.29
PB7: J4.6 U5.30 | length 779.5
  Top Layer w10: J4.6 1525,195 1460,260 1460,755 1519.96,814.96 U5.30
PC14: J4.7 U5.2 | length 1014
  Top Layer w10: v1(1665,840) 1665.18,839.82 1665.18,696.04 U5.2
  Bottom Layer w10: J4.7 1625,222.67 1450,397.67 1450,572.5 1635.47,757.97 1657.97,757.97 1665,765 v1(1665,840)
PC15: J4.8 U5.3 | length 590.1
  Top Layer w10: v1(1692.5,545) 1663.56,573.94 1663.56,621.06 1686.03,643.53 1695.35,652.87 1695.35,694.37 U5.3
  Bottom Layer w10: v1(1692.5,545) 1692.5,227.5 1725,195 J4.8
SPI_CLK: J6.2 R1.2 R7.1 U5.11 | length 291.3
  Top Layer w10: U5.11 1958.52,814.96 1978.48,795 J6.2 2121.44,795 R1.2 R7.1
SPI_DATA: J6.1 R2.2 R8.1 U4.2 U5.13 | length 790.7
  Top Layer w10: U5.13 1911.37,877.02 1960.8,877.02 1978.79,895 J6.1 2025.56,889.44 R2.2 R8.1 ; U4.2 v1(2051.18,1318.9)
  Bottom Layer w10: J6.1@2020.14,894.3 2020.14,1287.85 v1(2051.18,1318.9)
SWCLK: P1.4 U5.24 | length 379.5
  Top Layer w10: P1.4 1396.77,1268.78 1443.82,1268.78 1633.86,1078.74 U5.24
SWDIO: P1.2 U5.23 | length 438.7
  Top Layer w10: P1.2 1427.56,1328.35 1665.35,1090.55 U5.23
V_BAT: BT1.2 J9.2 | length 1380.5
  Top Layer w10: BT1.2@436.97,249.94 440,252.97 v1(440,345) ; J9.2@617.5,972.5 J9.2 ; BT1.2@883.03,249.94 885,251.91 v1(885,345)
  PWR w10: v1(440,345) v1(885,345) 885,710 J9.2
V_EXT: J1.1 J7.2 | length 379
  Top Layer w10: J1.1@427.44,1626.22 J1.1@431.22,1630
  PWR w10: J1.1 620,1460 J7.2
V_INN: C5.2 J7.1 J9.1 U1.1 U1.3 | length 947.3
  Top Layer w10: v1(730,1390) C5.2@792.72,1390 ; C5.2@809.17,1373.54 C5.2@792.72,1390 ; U1.1 815.16,1412.44 C5.2@792.72,1390 ; U1.3 866.43,1443.09 915.91,1443.09 v1(916,1443)
  PWR w10: J9.1 730,1185 v1(730,1390) ; J7.1 722.35,1357.35 722.35,1382.35 v1(730,1390) ; v1(916,1443) 783,1443 v1(730,1390)
VDD: C3.2 C6.2 C8.2 C13.2 C14.2 C15.2 J8.2 L1.2 P1.1 Q1.3 S1.A1 U1.5 U2.4 U5.5 U5.17 | length 1082.7
  Top Layer w10: v1(810,1625) 810,1569.92 815.15,1564.77 U1.5@815.15,1518 ; v1(1137.53,1292.65) 1165.82,1320.94 1248.01,1320.94 P1.1@1254.01,1326.94 ; L1.2 1724.41,510.83 1756.89,543.31 C14.2 ; U5.5 1759.84,607.28 C15.2 C14.2 ; v1(1779.53,492.81) 1778.44,492.81 1757.99,513.27 1757.99,543.19 C14.2 ; v1(1834.65,1251.97) C3.2 1844.49,1320.87 U2.4 ; U5.17@1856.3,1054.13 1856.3,1120.08 C13.2 v1(1858.27,1181.1) ; Q1.3 2248.97,432.65 2248.97,489.73 v1(2249.96,490.72) ; S1.A1 2437.81,836.26 2444.89,829.18 2464.89,829.18 2479.57,814.49 C8.2 2479.57,777.84 2502.3,755.11 v1(2502.3,754.14)
  PWR w10: v1(2502.3,754.14) 2550.31,754.14 2590.05,793.88 J8.2
VDDA: C11.2 C12.2 L1.1 U5.1 | length 245.9
  Top Layer w10: U5.1 1633.86,614.17 C12.2 C11.2 1626.97,543.31 1661.42,508.86 L1.1
pads on no net: P1.6 P1.7 P1.8 U1.4 U2.1 U2.3

## Polygon pours and split planes (outlines as drawn)
GND on GND "GND_L02_P000" (solid, pour order 0): 0,0 2952.76,0 2952.76,1968.5 0,1968.5
VDD on PWR "VDD_L03_P001" (solid, pour order 1): 0,0 2952.76,0 2952.76,1968.5 0,1968.5

## Keep-outs
Keep-Out Layer:
  the board outline again, w5

## Silkscreen, mask and mechanical layers (free items; w line width, h text height)
Top Overlay:
  drawing of 35 lines, arcs and shapes, not listed
  text "PB1" at 1788.67,1902.66 h35
  text "GND" at 1900.79,1903.05 h35
  text "GND" at 2619.24,1903.05 h35
  text "V_ext" at 393.8,1898.98 h50
  text "GND" at 229.61,1880.58 h35
  text "3V5-5V" at 393.8,1812.32 h50
  text "PA1" at 1643.19,1675.44 h35 r90
  text "PA8" at 1445.69,1663.78 h35 r90
  text "PA0" at 1544.44,1663.78 h35 r90
  text "PB0" at 1741.94,1663.78 h35 r90
  text "PA11" at 1149.44,1646.29 h35 r90
  text "PA12" at 1050.69,1634.62 h35 r90
  text "PA10" at 1248.19,1634.62 h35 r90
  text "PA12" at 1346.94,1634.62 h35 r90
  text "1" at 1200,1370 h40
  text "2" at 1400,1370 h40
  text "LED3" at 2378.35,1241 h40
  text "V_ext" at 692,1209 h60
  text "S1" at 2425,1171.5 h40
  text "LED4" at 2378.35,1102 h40
  text "NanEyeC + ADG902" at 2731.54,1013.33 h50 r90
  text "WCE Evaluation Board" at 2653.21,1008.33 h50 r90
  text "Design: Simen Odegard" at 2821.54,1008.33 h50 r90
  text "NTNU Master Thesis" at 2913.21,1008.33 h50 r90
  text "V_bat" at 692,928 h60
  text "Batteries" at 563.5,795 h60
  text "SR754SW" at 563.5,703.67 h60
  text "Total: 4V5" at 563.5,612.33 h60
  text "240mAh" at 563.5,521 h60
  text "Year: 2021" at 2913.21,346.7 h50 r90
  text "PA15" at 1045.77,221.15 h35 r90
  text "PB3" at 1145.57,221.15 h35 r90
  text "PB4" at 1245.36,221.15 h35 r90
  text "PB5" at 1345.16,221.15 h35 r90
  text "PB6" at 1444.96,221.15 h35 r90
  text "PB7" at 1544.76,221.15 h35 r90
  text "PA6" at 1844.16,219.1 h35 r90
  text "PA4" at 1943.96,219.1 h35 r90
  text "GND" at 2832.18,134.42 h35
  text "PC14" at 1480.21,23.59 h35
  text "PC15" at 1745.44,20.08 h35
  text "GND" at 221.83,18.87 h35